# EAGLE board example (EAGLE 7.2.0)
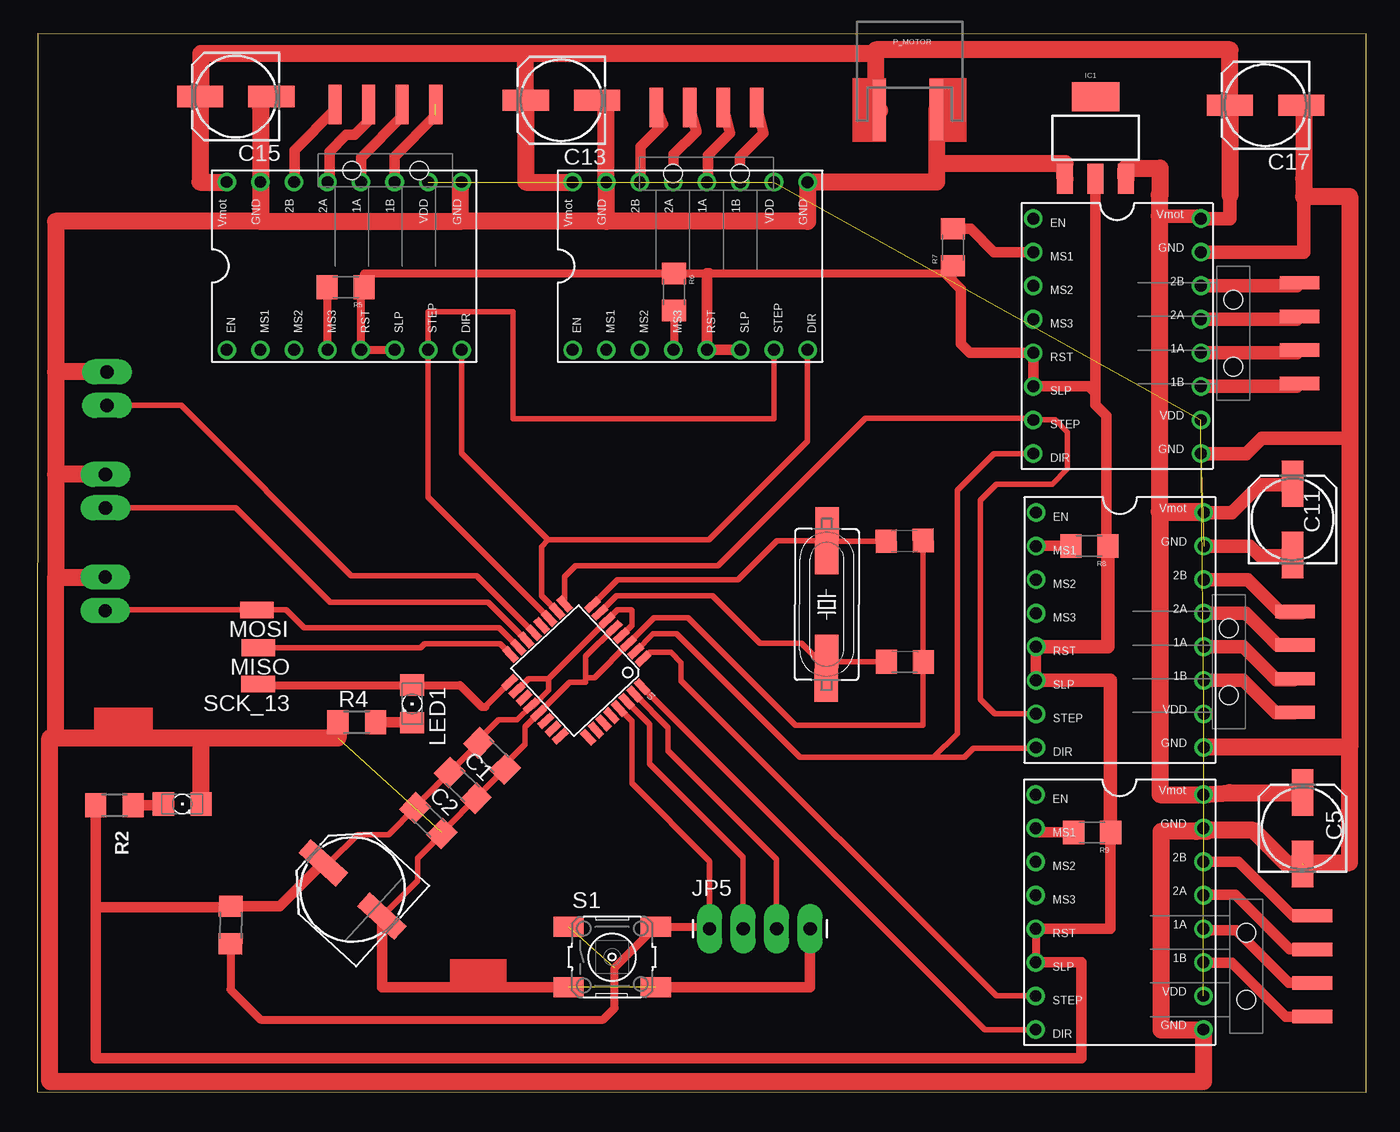
[diagram p0: board, top side]

Size 100.62 x 80.14 mm. Coordinates in mm from the lower left corner, seen from the top.
Outline: 0,0.04 100.62,0 100.6,80.09 0.04,80.14 0,0.04
Copper layers (1*16): Top 0.035mm / dielectric 1.5mm / Bottom 0.035mm
Design rules "default": minimum track width 10mil, minimum drill 24mil, track to track 10mil, track to pad 10mil, pad to pad 10mil, via to via 10mil, smd to smd 10mil, copper to edge 40mil, drill to drill 10mil, minimum pad ring 10mil, minimum via ring 8mil, stop-mask expansion 0mil, vias tented up to drill 0mil, thermal gap 10mil
Net classes: 0 default: width 0.203 mm; 1 power: width 0.305 mm, drill 0.711 mm, clearance 0.305 mm; 2 gnd: width 0.305 mm, drill 0.711 mm, clearance 0.254 mm; 3 usbvcc: width 0.508 mm, drill 0.711 mm, clearance 0.254 mm; 4 aref: width 0.305 mm

## Footprints (pad centres in the part's own frame; a part is rotated, then mirrored left to right if it is on the bottom)
C1206 = smd 1.6 x 1.8: 1 -1.4,0; 2 1.4,0
PANASONIC_E = smd 3.8 x 1.4: + 3,0; - -3,0
153CLV-0605 = smd 3.5 x 1.6: + 2.7,0; - -2.7,0
SOT223 = smd 1.219 x 2.235: 1 -2.311,-3.099; 2 0,-3.099; 3 2.311,-3.099 | smd 3.6 x 2.2: 4 0,3.099
1X04-SMD = smd 1 x 3: 1 -3.81,5; 2 -1.27,5; 3 1.27,5; 4 3.81,5 | hole 1.4: -2.54,0; 2.54,0
1X04_LONGPADS = drill 1.016 pad 1.88 long: 1 0,0; 2 2.54,0; 3 5.08,0; 4 7.62,0
1206 = smd 1.6 x 1.803: A -1.422,0; C 1.422,0
SMD1,27-2,54 = smd 1.27 x 2.54: 1 0,0
S2B-PH = smd 1 x 4.6: 1 -2.27,-3.7; 2 2.048,-3.666
SM49 = smd 5.08 x 1.778: 1 -4.826,0; 2 4.826,0
R1206 = smd 1.6 x 1.803: 1 -1.422,0; 2 1.422,0
1206' = smd 1.6 x 1.8: 1 -1.4,0; 2 1.4,0
6MM_SWITCH = smd 2.286 x 1.524: 1 -3.302,2.286; 2 3.302,2.286; 3 -3.302,-2.286; 4 3.302,-2.286
TQFP32-08 = smd 1.27 x 0.559: 1 -4.293,2.8; 2 -4.293,2; 3 -4.293,1.2; 4 -4.293,0.4; 5 -4.293,-0.4; 6 -4.293,-1.2; 7 -4.293,-2; 8 -4.293,-2.8; 17 4.293,-2.8; 18 4.293,-2; 19 4.293,-1.2; 20 4.293,-0.4; 21 4.293,0.4; 22 4.293,1.2; 23 4.293,2; 24 4.293,2.8 | smd 0.559 x 1.27: 9 -2.8,-4.293; 10 -2,-4.293; 11 -1.2,-4.293; 12 -0.4,-4.293; 13 0.4,-4.293; 14 1.2,-4.293; 15 2,-4.293; 16 2.8,-4.293; 25 2.8,4.293; 26 2,4.293; 27 1.2,4.293; 28 0.4,4.293; 29 -0.4,4.293; 30 -1.2,4.293; 31 -2,4.293; 32 -2.8,4.293
A4988BREAKOUT = drill 0.9: 1A 8.89,1.27; 1B 11.43,1.27; 2A 6.35,1.27; 2B 3.81,1.27; DIR 16.51,-11.43; EN -1.27,-11.43; GND 16.51,1.27; GND@0 1.27,1.27; MS1 1.27,-11.43; MS2 3.81,-11.43; MS3 6.35,-11.43; RST 8.89,-11.43; SLP 11.43,-11.43; STEP 13.97,-11.43; VDD 13.97,1.27; VMOT -1.27,1.27
1X02_LONGPADS = drill 1.016 pad 1.88 long: 1 0,0; 2 2.54,0

## Placement (x,y rotation side)
C1  100n  [C1206]  32.19,23.22 315.4 top
C2  10u  [C1206]  29.6,20.55 316.1 top
C3  100uF  [PANASONIC_E]  23.85,15.33 137.8 top
C5  47uF  [153CLV-0605]  95.78,19.98 90 top
C6  1u  [C1206]  34.41,25.45 315.2 top
C7  22p  [C1206]  65.65,41.72 181.3 top
C8  22p  [C1206]  65.67,32.57 179.7 top
C11  47uF  [153CLV-0605]  95.02,43.35 90 top
C13  47uF  [153CLV-0605]  39.66,75.07 180 top
C15  47uF  [153CLV-0605]  15.01,75.35 180 top
C17  47uF  [153CLV-0605]  92.97,74.7 180 top
IC1  [SOT223]  80.09,72.23 0 top
JP1  [1X04-SMD]  26.34,69.76 0 top
JP2  [1X04-SMD]  91.52,9.54 270 top
JP3  [1X04-SMD]  90.54,57.44 270 top
JP4  [1X04-SMD]  90.19,32.57 270 top
JP5  [1X04_LONGPADS]  50.88,12.37 0 top
JP9  [1X04-SMD]  50.65,69.52 0 top
LED1  [1206]  28.36,29.39 270 top
LED_PWR  [1206]  10.96,21.81 0 top
MISO  [SMD1,27-2,54]  16.71,33.64 90 top
MOSI  [SMD1,27-2,54]  16.61,36.5 90 top
P_MOTOR  [S2B-PH]  66.02,78.01 0 top
Q1  16MHz  [SM49]  59.75,36.91 269.8 top
R1  10k  [R1206]  14.62,12.64 89.6 top
R2  1k  [R1206]  5.83,21.71 0 top
R4  [R1206]  24.16,27.99 0 top
R5  [1206']  23.34,60.92 180 top
R6  [1206']  48.19,60.56 270 top
R7  [1206']  69.3,63.94 90 top
R8  [1206']  79.63,41.34 180 top
R9  [1206']  79.84,19.66 180 top
S1  [6MM_SWITCH]  43.5,10.23 0 top
SCK_13  [SMD1,27-2,54]  16.7,30.89 90 top
U1  ATMEGA168  [TQFP32-08]  40.8,31.9 223.1 top
XAXIS  A4988BREAKOUT  [A4988BREAKOUT]  87,21.25 270 top
XLIMIT  [1X02_LONGPADS]  5.25,51.97 90 top
YAXIS1  A4988BREAKOUT  [A4988BREAKOUT]  87.03,42.6 270 top
YAXIS2  A4988BREAKOUT  [A4988BREAKOUT]  86.81,64.85 270 top
YLIMIT  [1X02_LONGPADS]  5.15,44.22 90 top
ZAXIS1  A4988BREAKOUT  [A4988BREAKOUT]  41.79,67.6 0 top
ZAXIS2  A4988BREAKOUT  [A4988BREAKOUT]  15.61,67.61 0 top
ZLIMIT  [1X02_LONGPADS]  5.12,36.44 90 top

## Library data of the parts
C1 C2 C6-C8 R1 R2 = rcl
C3 IC1 JP5 P_MOTOR R5-R9 U1 XLIMIT YLIMIT ZLIMIT = 01_SparkFun
C5 C11 C13 C15 C17 LED1 R4 = 01_adafruit
JP1-JP4 JP9 = SparkFun-Connectors
LED_PWR = led
MISO MOSI SCK_13 = wirepad
Q1 = crystal; OC_FARNELL: unknown; OC_NEWARK: unknown
S1 = 01_fab
XAXIS YAXIS1 YAXIS2 ZAXIS1 ZAXIS2 = RepRapjr

## Nets
2: U1.32 XAXIS.DIR
3: U1.1 XAXIS.STEP
4: U1.2 YAXIS1.DIR YAXIS2.DIR
5: U1.9 YAXIS1.STEP YAXIS2.STEP
6: U1.10 ZAXIS1.DIR ZAXIS2.DIR
7: U1.11 ZAXIS1.STEP ZAXIS2.STEP
8: U1.12
9: U1.13 XLIMIT.1
10: U1.14 YLIMIT.1
A1: U1.24
A2: U1.25
A3: U1.26
A4_SDA: U1.27
A5_SCL: U1.28
A7: U1.22
GND: C1.2 C2.2 C3.- C5.- C6.2 C7.1 C8.1 C11.- C13.- C15.- C17.- IC1.1 JP5.4 LED_PWR.C P_MOTOR.2 R4.1 S1.3 S1.4 U1.3 U1.5 U1.21 XAXIS.GND XAXIS.GND@0 XLIMIT.2 YAXIS1.GND YAXIS1.GND@0 YAXIS2.GND YAXIS2.GND@0 YLIMIT.2 ZAXIS1.GND ZAXIS1.GND@0 ZAXIS2.GND ZAXIS2.GND@0 ZLIMIT.2
MISO_12: MISO.1 U1.16
MOSI_11: MOSI.1 U1.15 ZLIMIT.1
N$1: LED_PWR.A R2.2
N$3: R7.2 YAXIS2.MS1
N$4: JP1.2 ZAXIS2.2A
N$5: JP1.1 ZAXIS2.2B
N$6: LED1.C R4.2
N$7: JP1.3 ZAXIS2.1A
N$9: JP2.1 XAXIS.2B
N$10: JP2.2 XAXIS.2A
N$11: JP2.3 XAXIS.1A
N$12: JP2.4 XAXIS.1B
N$14: JP1.4 ZAXIS2.1B
N$16: JP3.2 YAXIS2.2A
N$18: JP4.2 YAXIS1.2A
N$19: JP4.1 YAXIS1.2B
N$20: JP4.3 YAXIS1.1A
N$21: JP4.4 YAXIS1.1B
N$22: JP3.1 YAXIS2.2B
N$23: JP3.3 YAXIS2.1A
N$24: JP3.4 YAXIS2.1B
N$25: JP9.2 ZAXIS1.2A
N$31: JP9.1 ZAXIS1.2B
N$35: R5.2 ZAXIS2.MS3
N$36: JP9.3 ZAXIS1.1A
N$37: JP9.4 ZAXIS1.1B
N$38: R6.2 ZAXIS1.MS3
N$39: R8.2 YAXIS1.MS1
N$41: R9.2 XAXIS.MS1
RESET: JP5.1 R1.1 S1.1 S1.2 U1.29
RX: JP5.3 U1.31
SCK_13: LED1.A SCK_13.1 U1.17
TX: JP5.2 U1.30
VCC: C1.1 C2.1 C3.+ C6.1 IC1.2 R1.2 R2.1 R5.1 R6.1 R7.1 R8.1 R9.1 U1.4 U1.6 U1.18 U1.20 XAXIS.RST XAXIS.SLP YAXIS1.RST YAXIS1.SLP YAXIS2.RST YAXIS2.SLP ZAXIS1.RST ZAXIS1.SLP ZAXIS2.RST ZAXIS2.SLP
VDD: XAXIS.VDD YAXIS1.VDD YAXIS2.VDD ZAXIS1.VDD ZAXIS2.VDD
VMOT: C5.+ C11.+ C13.+ C15.+ C17.+ IC1.3 P_MOTOR.1 XAXIS.VMOT YAXIS1.VMOT YAXIS2.VMOT ZAXIS1.VMOT ZAXIS2.VMOT
XTAL1: C8.2 Q1.2 U1.7
XTAL2: C7.2 Q1.1 U1.8

## Tracks (layer width: path | path; a pad name or v marks a point on that pad's centre or on a via)
2
  Top 0.406: U1.32 71.72,4.74 XAXIS.DIR
3
  Top 0.406: U1.1 46.34,33.28 47.97,33.28 48.74,32.51 48.74,31.15 72.61,7.28 XAXIS.STEP
4
  Top 0.406: U1.2 46.6,34.68 48.39,34.68 57.71,25.35 67.85,25.35 | 67.85,25.35 70.17,25.35 70.86,26.05 75.55,26.05 YAXIS1.DIR | YAXIS2.DIR 72.41,48.34 69.64,45.57 69.64,27.14 67.85,25.35
5
  Top 0.406: U1.9 39.91,38.99 40.74,39.83 51.51,39.83 62.69,51.01 75.25,51.01 YAXIS2.STEP 77.06,50.88 77.98,49.96 77.98,47.18 76.82,46.03 72.59,46.03 71.38,44.81 71.38,29.75 72.47,28.65 75.58,28.65 YAXIS1.STEP
6
  Top 0.406: U1.10 38.15,37.59 38.15,41.28 38.67,41.8 | 38.67,41.8 50.83,41.8 58.3,49.28 ZAXIS1.DIR | ZAXIS2.DIR 32.12,48.36 38.67,41.8
7
  Top 0.406: U1.11 29.58,45.02 ZAXIS2.STEP 29.58,59.06 36,59.06 36,50.96 55.75,50.96 ZAXIS1.STEP
9
  Top 0.406: U1.13 33.24,39.1 23.74,39.1 10.87,51.97 XLIMIT.1
10
  Top 0.406: U1.14 34.12,37.09 22.14,37.09 15.01,44.22 YLIMIT.1
GND  (4 unrouted)
  Top 0.406: C8.1 67.05,32.59 | U1.5 41.51,32.98 41.51,31.36 | 41.51,31.36 41.51,31.01 40.26,31.01 U1.21 36.93,27.67 36.93,26.34 35.01,24.42 35.01,24.13 35.35,24.46 C6.2 C1.2 30.99,20.05 | 41.51,31.36 42.15,31.36 U1.3 46.68,35.89 49.26,35.89 57.37,27.78 67.05,27.78 67.05,32.59 | 67.05,32.59 C7.1 | 30.99,20.05 30.61,19.66 C2.2 | 30.99,20.05 30.99,19.94 28.76,17.7 28.76,16 C3.-
  Top 0.813: JP5.4 58.5,7.94 S1.4 | S1.3 26.08,7.94 C3.-
  Top 1.016: YAXIS1.GND@0 91.78,41.33 92.52,40.58 94.95,40.58 C11.- | YAXIS2.GND 91.51,48.34 92.68,49.51 99.34,49.51 | YAXIS2.GND@0 95.87,63.58 95.87,69.14
  Top 1.27: P_MOTOR.2 68.07,70.28 | 68.07,70.28 68.07,68.88 ZAXIS1.GND 58.3,65.9 43.06,65.9 | 99.34,26.09 99.34,17.37 95.97,17.37 95.87,17.27 94.61,17.27 92.07,19.81 87.81,19.81 87.73,19.74 | 99.34,26.09 YAXIS1.GND | 99.34,26.09 99.34,49.51 99.34,67.8 95.87,67.8 95.87,69.14 95.87,74.7 C17.- | 16.88,65.9 ZAXIS2.GND@0 16.88,74.52 arc-90 C15.- | 16.88,65.9 32.03,65.9 | 32.03,65.9 32.03,68.88 ZAXIS2.GND | 43.06,65.9 ZAXIS1.GND@0 43.06,75.23 43.16,75.23 43.16,75.07 C13.- | 43.06,65.9 32.03,65.9 | 16.88,65.9 1.37,65.9 1.37,54.51 | 1.37,54.51 1.37,46.76 | 1.37,46.76 1.37,38.96 | 1.37,38.96 5.12,38.96 ZLIMIT.2 | XLIMIT.2 1.37,54.51 | YLIMIT.2 1.37,46.76 | LED_PWR.C 12.38,26.8 | 12.38,26.8 1.37,26.8 | 1.37,26.8 1.37,38.96 | R4.1 22.74,26.8 12.38,26.8 | XAXIS.GND 88.27,4.71 | 88.27,4.71 88.27,0.79 0.93,0.79 0.93,26.8 1.37,26.8 | IC1.1 77.78,70.28 68.07,70.28 | XAXIS.GND@0 88.51,19.74 87.73,19.74 | 87.73,19.74 85.06,19.74 85.06,4.71 88.27,4.71
MISO_12
  Top 0.406: U1.16 35.02,33.92 29.29,33.92 29.01,33.64 MISO.1
MOSI_11
  Top 0.406: ZLIMIT.1 5.19,36.5 MOSI.1 18.84,36.5 20.19,35.14 34.93,35.14 U1.15
N$1
  Top 0.813: R2.2 9.54,21.71 LED_PWR.A
N$3
  Top 0.813: R7.2 70.66,65.34 72.42,63.58 YAXIS2.MS1
N$4
  Top 0.813: JP1.2 25.07,73.51 24.02,72.46 23.37,72.46 22.1,71.19 22.1,69.02 ZAXIS2.2A
N$5
  Top 0.813: JP1.1 22.53,74.38 19.45,71.3 19.45,68.92 ZAXIS2.2B
N$6
  Top 0.813: R4.2 28.36,27.99 LED1.C
N$7
  Top 0.813: JP1.3 27.61,73.84 24.49,70.72 ZAXIS2.1A
N$9
  Top 0.813: JP2.1 95.03,13.35 90.91,17.46 88.29,17.46 XAXIS.2B
N$10
  Top 0.813: JP2.2 94.82,10.81 90.67,14.95 88.32,14.95 XAXIS.2A
N$11
  Top 0.813: JP2.3 94.75,8.27 90.77,12.25 88.39,12.25 XAXIS.1A
N$12
  Top 0.813: JP2.4 94.49,5.73 90.43,9.78 88.31,9.78 XAXIS.1B
N$14  (1 unrouted)
  Top 0.813: 30.15,73.92 27.02,70.79 27.02,68.9 ZAXIS2.1B
N$16
  Top 1.016: YAXIS2.2A 95.33,58.5 JP3.2
N$18
  Top 1.016: YAXIS1.2A 91.47,36.25 93.86,33.86 95.17,33.86 JP4.2
N$19
  Top 1.016: YAXIS1.2B 91.65,38.79 94.15,36.29 95.76,36.29 95.88,36.42 95.23,36.42 JP4.1
N$20
  Top 1.016: YAXIS1.1A 91.29,33.71 93.8,31.2 95.1,31.2 JP4.3
N$21
  Top 1.016: YAXIS1.1B 91.28,31.17 93.73,28.71 95.15,28.71 JP4.4
N$22
  Top 1.016: YAXIS2.2B 95.33,61.04 JP3.1
N$23
  Top 1.016: YAXIS2.1A 95.33,55.96 JP3.3
N$24
  Top 1.016: YAXIS2.1B 95.33,53.42 JP3.4
N$25
  Top 0.813: JP9.2 49.88,72.71 48.15,70.97 48.15,68.89 ZAXIS1.2A
N$31
  Top 0.813: JP9.1 47.34,73.24 45.65,71.55 45.65,68.93 ZAXIS1.2B
N$35
  Top 0.61: ZAXIS2.MS3 21.96,60.92 R5.2
N$36
  Top 0.813: JP9.3 52.42,72.56 50.76,70.9 50.76,68.95 ZAXIS1.1A
N$37
  Top 0.813: JP9.4 54.96,72.57 53.19,70.79 53.19,68.91 ZAXIS1.1B
N$38
  Top 0.61: R6.2 48.19,56.23 ZAXIS1.MS3
N$39
  Top 0.61: 75.6,41.35 YAXIS1.MS1
  Top 0.813: 75.6,41.35 R8.2
N$41
  Top 0.813: R9.2 75.57,19.66 XAXIS.MS1
RESET  (1 unrouted)
  Top 0.406: U1.29 45.01,28.06 45.01,23.36 50.88,17.5 JP5.1
  Top 0.61: R1.1 14.61,7.77 16.89,5.49 42.83,5.49 43.7,6.36 43.7,9.41 S1.2 50.73,12.51 JP5.1
RX
  Top 0.406: U1.31 47.75,27.58 47.75,25.86 55.96,17.64 JP5.3
SCK_13
  Top 0.406: U1.17 33.9,29.17
  Top 0.61: SCK_13.1 16.7,30.81 LED1.A 31.99,30.81 33.64,29.17 33.9,29.17
TX
  Top 0.406: U1.30 46.34,27.86 46.34,24.85 53.42,17.77 JP5.2
VCC
  Top 0.406: U1.4 45,35.35 45,36.44 44.93,36.52 43.91,36.52 U1.6 38.69,31.3 | 38.69,31.3 38.69,30.4 37.55,29.26 U1.20 36.31,28.19 34.9,28.19 33.41,26.7 C6.1 31.19,24.21 C1.1 28.59,21.6 C2.1 26.57,19.5 24.25,19.5 22.1,17.35 C3.+ | U1.18 37.16,31.3 38.69,31.3
  Top 0.61: ZAXIS2.SLP ZAXIS2.RST 24.5,60.92 R5.1 24.74,61.96 R6.1 50.83,61.96 68.72,61.96 R7.1 | XAXIS.RST XAXIS.SLP
  Top 0.813: YAXIS1.RST YAXIS1.SLP | ZAXIS1.SLP ZAXIS1.RST 50.68,61.96 50.83,61.96 | XAXIS.RST 81.24,12.36 R9.1 | IC1.2 80.09,52.92 | 80.09,52.92 80.09,52.02 80.93,51.18 80.93,41.4 81.4,40.94 81.4,40.97 R8.1 | 80.09,52.92 79.6,53.42 YAXIS2.SLP YAXIS2.RST 70.6,55.96 69.93,56.63 69.93,60.76 68.72,61.96 | C3.+ 18.34,14.06 R1.2 14.63,14 4.41,14 | R2.1 4.41,14 | 4.41,14 4.41,2.58 79.03,2.58 79.03,9.82 XAXIS.SLP
  Top 1.016: YAXIS1.RST 81.03,33.71 R8.1 | YAXIS1.SLP 81.24,31.17 R9.1
VDD  (4 unrouted)
VMOT
  Top 1.016: YAXIS1.VMOT 90.42,43.87 92.52,45.97 94.94,45.97 C11.+ | 90.27,67.9 90.27,66.12 YAXIS2.VMOT 88.09,66.3 84.93,66.3
  Top 1.27: 63.46,78.6 63.46,78.89 90.27,78.89 C17.+ 90.27,67.9 | P_MOTOR.1 63.46,74.31 63.46,78.6 | C5.+ 90.25,22.68 XAXIS.VMOT 84.98,22.52 84.98,43.87 YAXIS1.VMOT 88.3,43.95 84.93,43.95 84.93,66.3 84.93,67.9 84.98,67.9 84.98,69.94 82.41,69.94 IC1.3 | ZAXIS2.VMOT 12.31,68.88 C15.+ 12.36,75.35 12.36,78.6 36.96,78.6 | 36.96,78.6 C13.+ 36.96,68.88 ZAXIS1.VMOT | 63.46,78.6 36.96,78.6
XTAL1
  Top 0.406: C8.2 60.22,32.58 Q1.2 57.83,33.99 54.7,33.99 51.12,37.57 43.84,37.57 U1.7
XTAL2
  Top 0.406: C7.2 59.81,41.69 Q1.1 55.98,41.73 53.03,38.79 43.92,38.79 U1.8
(copper drawn outside any net)
  shapes: Top area x2